# Altium PCB receiver_plane_2S_A.PcbDoc
Units mil, origin at the board's own origin, x right, y up, seen from the top; angles counter-clockwise.
Board outline 6000 x 4000 mil, 2 copper layers (Top Layer, Bottom Layer); 46 components, 38 nets, 159 pads, 9 vias.
Unrouted connection lines stored in the file: 113.
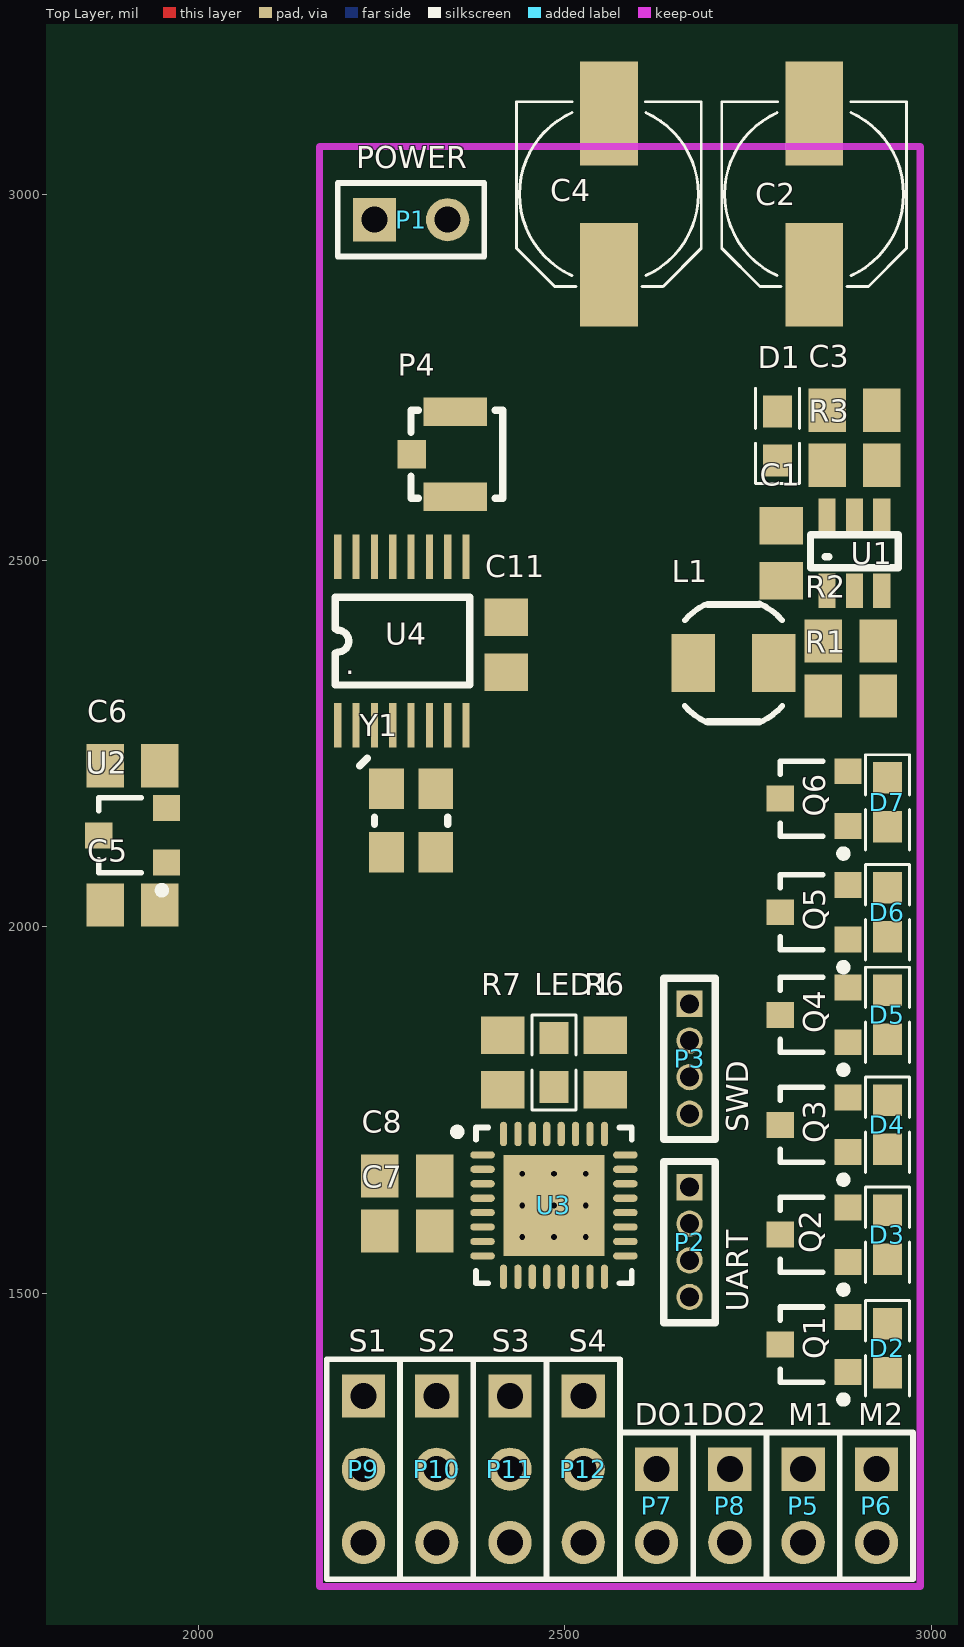
[diagram p0: Top Layer view]
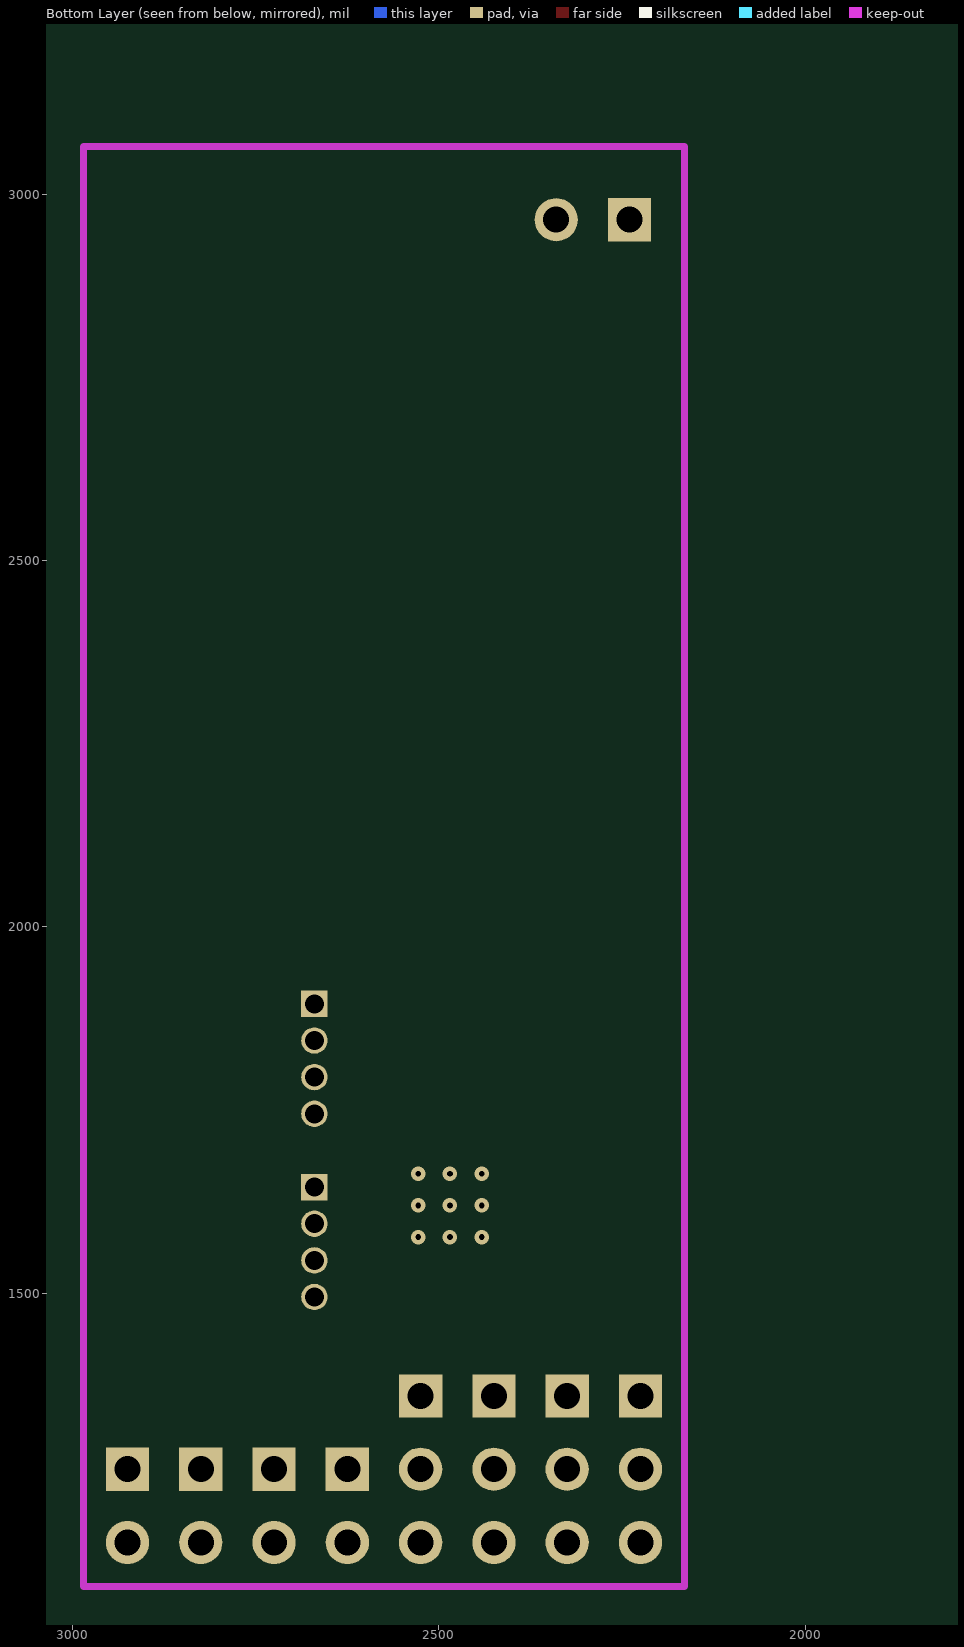
[diagram p1: Bottom Layer view, seen from below]

## Layer stack, top to bottom
Top Layer: signal copper 1.4
Dielectric: dielectric 12.6, FR-4, Dk 4.8
Bottom Layer: signal copper 1.4

## Board outline
1000,1000 7000,1000 7000,5000 1000,5000

## Design rules (kind name [scope] priority, off if disabled: settings)
Clearance [All] p1: gap=6
ComponentClearance [All] p1 off: gap=10 collisioncheckmode=3 verticalgap=10 showdistances=FALSE
PolygonConnect [All] p1: connectstyle=Relief reliefconductorwidth=10 reliefentries=4 polygonreliefangle="90 Angle"
RoutingVias [All] p1: holewidth=28 width=50 viastyle="Through Hole" minholewidth=28 minwidth=50 maxholewidth=28 maxwidth=50
SilkToSilkClearance [All] p1 off: silktosilkclearance=10
SilkscreenOverComponentPads [All] p1: minsilkscreentomaskgap=10
SolderMaskExpansion [All] p1: expansion=4
Width [All] p1: maxlimit=100 minlimit=10 preferedwidth=10 minimp=50.000000 maximp=50.000000 favimp=50.000000
25 further rules are at their usual default settings.

## Components (designator, comment, footprint, x,y, rotation, side; value= is the part's Value field where it differs from the comment)
C1 "103" 0805-2 2795,2510 r90 top
C2 "Cap Pol" C-RB-S6 2840,3000 r90 top
C3 "104" 0805-2 2895,2705 r180 top
C4 "Cap Pol" C-RB-S6 2560,3000 r90 top
C5 "Cap" 0805-2 1910,2030 r0 top
C6 "Cap" 0805-2 1910,2220 r180 top
C7 "Cap" 0805-2 2285,1585 r0 top
C8 "Cap" 0805-2 2285,1660 r180 top
C11 "Cap" 0805-2 2420,2385 r270 top
D1 "1N5819" SOD523 2790,2670 r270 top
D2 "1N5819" SOD523 2940,1425 r90 top
D3 "1N5819" SOD523 2940,1580 r90 top
D4 "1N5819" SOD523 2940,1730 r90 top
D5 "1N5819" SOD523 2940,1880 r90 top
D6 "1N5819" SOD523 2940,2020 r90 top
D7 "1N5819" SOD523 2940,2170 r90 top
L1 "Inductor" l-SMD-4 2730,2360 r0 top
LED1 "red" 0603-1 2485,1815 r270 top
P1 "POWER" HDR2X1_A 2240,2965 r0 top
P2 "UART" HDR4*1*1.27 2670,1595 r270 top
P3 "SWD" HDR4*1*1.27 2670,1845 r270 top
P4 "IPEX" U.FL-R-SMT 2350,2645 r270 top
P5 "M1" HDR2X1_A 2825,1260 r270 top
P6 "M2" HDR2X1_A 2925,1260 r270 top
P7 "DO1" HDR2X1_A 2625,1260 r270 top
P8 "DO2" HDR2X1_A 2725,1260 r270 top
P9 "S1" HDR3X1_A 2225,1360 r270 top
P10 "S2" HDR3X1_A 2325,1360 r270 top
P11 "S3" HDR3X1_A 2425,1360 r270 top
P12 "S4" HDR3X1_A 2525,1360 r270 top
Q1 "AO3400" SOT-23-3L 2840,1430 r90 top
Q2 "AO3400" SOT-23-3L 2840,1580 r90 top
Q3 "AO3400" SOT-23-3L 2840,1730 r90 top
Q4 "AO3400" SOT-23-3L 2840,1880 r90 top
Q5 "AO3400" SOT-23-3L 2840,2020 r90 top
Q6 "AO3400" SOT-23-3L 2840,2175 r90 top
R1 "Res1" 0805-2 2890,2315 r0 top
R2 "Res1" 0805-2 2890,2390 r180 top
R3 "Res1" 0805-2 2895,2630 r0 top
R6 "Res1" 0805-2 2555,1815 r90 top
R7 "Res1" 0805-2 2415,1815 r270 top
U1 "MP2359" TSOT23-6 2895,2510 r0 top
U2 "662K" SOT-23 1910,2125 r90 top
U3 "STM32F050K4U6" STM-UFQFPN32_N 2485,1620 r0 top
U4 "LT8920" "SSOP-16 LT8920" 2280,2390 r0 top
Y1 "12M" XTAL_3225 2290,2145 r270 top

## Footprints (in the part's own frame and the unit in brackets; to place one, negate y for a bottom-side part, rotate by r counter-clockwise, add the part's x,y. Pads: shape width x height; smd on the part's side, far side on the other; paste and mask are expansions set on the pad)
0603-1 [mm] "贴片"
  rect 1.1x1 smd: 1(-0.85,0) 2(0.85,0)
  silkscreen extent -1.65,-0.76 1.65,0.76, body extent -1.14,-0.38 1.14,0.38, height 1
0805-2 [mm] "贴片"
  rect 1.3x1.5 smd: 1(-0.95,0) 2(0.95,0)
  body extent -1.02,-0.51 1.02,0.51, height 1
C-RB-S6 [mm]
  rect 3.6x2 smd: 1(-2.794,0) 2(2.794,0)
  silkscreen extent -3.2,-3.2 3.2,3.2
HDR2X1_A [mm] "Connector; Header; 2 Posi"
  rect 1.5x1.5 hole 0.9: 1(0,0)
  round 1.5 hole 0.9: 2(2.54,0)
  silkscreen extent -1.27,-1.27 3.81,1.27
HDR3X1_A [mm] "Connector; Header; 3 Posi"
  rect 1.5x1.5 hole 0.9: 1(0,0)
  round 1.5 hole 0.9: 2(2.54,0) 3(5.08,0)
  silkscreen extent -1.27,-1.27 6.35,1.27
HDR4*1*1.27 [mil]
  rect 36x36 hole 26: 1(-50,0)
  round 36 hole 26: 2(0,0) 3(50,0) 4(100,0)
  silkscreen extent -85,-35 135,35
l-SMD-4 [mm] "CD43Ì"
  rect 1.5x2 smd: 1(-1.397,0) 2(1.397,0)
  silkscreen extent -1.69,-2.04 1.69,2.06
SOD523 [mm] "D1N5819_06"
  rect 1.1x1 smd: 1(-0.85,0) 2(0.85,0)
  silkscreen extent -1.65,-0.76 1.65,0.76, body extent -1.14,-0.38 1.14,0.38, height 1
SOT-23 [mm]
  rect 0.9x0.95 smd: 1(-0.95,-1.175) 2(0.95,-1.175) 3(0,1.175)
  silkscreen extent -2.03,-1.14 1.3,1.18
SOT-23-3L [mm] "AO3400"
  rect 0.9x0.95 smd: D(0,1.175) G(-0.95,-1.175) S(0.95,-1.175)
  silkscreen extent -2.03,-1.14 1.3,1.18
"SSOP-16 LT8920" [mil]
  rect 9.84x61.02 smd: 1(-90,-115) 2(-65,-115) 3(-40,-115) 4(-15,-115) 5(10,-115) 6(35,-115) 7(60,-115) 8(85,-115) 9(85,115) 10(60,115) 11(35,115) 12(10,115) 13(-15,115) 14(-40,115) 15(-65,115) 16(-90,115)
  silkscreen extent -93,-60 90,60
STM-UFQFPN32_N [mm] "QFN, 32-Leads, Body 5.1x5.1mm, Pitch 0.5mm, Thermal Pad 3.5x3.5mm, IPC Medium Density"
  oval 0.85x0.25 smd: 1(-2.475,1.75) 2(-2.475,1.25) 3(-2.475,0.75) 4(-2.475,0.25) 5(-2.475,-0.25) 6(-2.475,-0.75) 7(-2.475,-1.25) 8(-2.475,-1.75) 17(2.475,-1.75) 18(2.475,-1.25) 19(2.475,-0.75) 20(2.475,-0.25) 21(2.475,0.25) 22(2.475,0.75) 23(2.475,1.25) 24(2.475,1.75)
  oval 0.25x0.85 smd: 9(-1.75,-2.475) 10(-1.25,-2.475) 11(-0.75,-2.475) 12(-0.25,-2.475) 13(0.25,-2.475) 14(0.75,-2.475) 15(1.25,-2.475) 16(1.75,-2.475) 25(1.75,2.475) 26(1.25,2.475) 27(0.75,2.475) 28(0.25,2.475) 29(-0.25,2.475) 30(-0.75,2.475) 31(-1.25,2.475) 32(-1.75,2.475)
  rect 3.5x3.5 smd: 33(0,0)
  silkscreen extent -3.47,-2.7 2.7,2.7, body extent -2.55,-2.55 2.55,2.55, height 0.6
TSOT23-6 [mm] "MP2359"
  rect 0.6x1.2 smd: 1(-0.95,-1.3) 2(0,-1.3) 3(0.95,-1.3) 4(0.95,1.3) 5(0,1.3) 6(-0.95,1.3)
  silkscreen extent -1.52,-0.51 1.52,0.64
U.FL-R-SMT [mm] "IPEX插?"
  rect 1x1 smd: 1(0,-1.5)
  rect 1x2.2 smd: 2(-1.475,0) 3(1.475,0)
  silkscreen extent -1.52,-1.52 1.52,1.65
XTAL_3225 [mm] "Ì"
  rect 1.4x1.2 smd: 1(-1.1,-0.85) 2(1.1,-0.85) 3(1.1,0.85) 4(-1.1,0.85)
  silkscreen extent -2.16,-1.78 0.13,1.27

## Part data
C1 C3: library part "Cap Semi", "Capacitor (Semiconductor SIM Model)"
C2 C4: "极性电½"
C5 C6 C7 C8 C11: "无极性电容"
D1 D2 D3 D4 D5 D6 D7: library part Diode, "二极管"
L1: "电感"
LED1: library part LED3, "Typical BLUE SiC LED"
P1 P5 P6 P7 P8: library part "Header 2", "接插件"
P2 P3: library part "Header 4", "接插"
P4: "U.FL-R-SMT"
P9 P10 P11 P12: library part "Header 3", "接插件"
Q1 Q2 Q3 Q4 Q5 Q6: library part MOSFET-N, "N-Channel MOSFET"
R1 R2 R3 R6 R7: "贴片电阻"
U3: "ARM Cortex-M0 32-bit MCU, 16 KB Flash, 4 KB Internal RAM, 27 I/Os, 32-pin UFQFPN, -40 to 85 degC, Tray"
Y1: library part XTAL-4PIN, "贴片晶振"

## Via types
v1: diameter 19.68, hole 7.87, Top Layer to Bottom Layer, 9 vias

## Nets (pads, with @x,y where several pads share a name; then routed paths per layer and width w, separated by ;. In a path a pad name is that pad's centre, name@x,y a point inside that pad or via, vN(x,y) a via of type N, cw(c..) or ccw(c..) an arc to the next point about the centre after c; other vN are vias at no path point)
3V3: C6.1 C7.2 P3.4 R7.2 U2.2 U3.1 U3.5 U3.17 U4.12
5V: C4.1 C5.1 L1.2 P2.4 P9.1 P10.1 P11.1 P12.1 R1.1 U2.3
ANT: P4.1 U4.10
BAT+: C2.1 C3.2 D2.2 D3.2 D4.2 D5.2 D6.2 D7.2 P1.1 P5.1 P6.1 P7.1 P8.1 R3.1 U1.5
DO1_N: D6.1 P7.2 Q5.D
DO2_N: D7.1 P8.2 Q6.D
GND: C2.2 C3.1 C4.2 C5.2 C6.2 C7.1 C8.2 C11.1 D1.1 P1.2 P2.1 P3.3 P4.2 P4.3 P9.3 P10.3 P11.3 P12.3 Q1.S Q2.S Q3.S Q4.S Q5.S Q6.S R2.2 R6.2 U1.2 U2.1 U3.33 U4.9 U4.15 Y1.2 Y1.4
  other v1: 2441.69,1576.69 2485,1576.69 2528.31,1576.69 2441.69,1620 2485,1620 2528.31,1620 2441.69,1663.31 2485,1663.31 2528.31,1663.31
LED1: LED1.2 U3.32
LT8920_CS: U3.29 U4.14
LT8920_PKT: U3.30 U4.13
LT8920_RST: U3.25 U4.4
MOTO1_N: D2.1 D3.1 P5.2 Q1.D Q2.D
MOTO2_N: D4.1 D5.1 P6.2 Q3.D Q4.D
NetC1_1: C1.1 U1.1
NetC1_2: C1.2 D1.2 L1.1 U1.6
NetC8_1: C8.1 U3.4
NetC11_2: C11.2 U4.3 U4.5 U4.8 U4.11
NetLED1_1: LED1.1 R7.1
NetR1_2: R1.2 R2.1 U1.3
NetR3_2: R3.2 U1.4
NetR6_1: R6.1 U3.31
NetU4_6: U4.6 Y1.1
NetU4_7: U4.7 Y1.3
PWM_DO1: Q5.G U3.8
PWM_DO2: Q6.G U3.9
PWM_M1: Q1.G Q2.G U3.6
PWM_M2: Q3.G Q4.G U3.7
SERVO1: P9.2 U3.12
SERVO2: P10.2 U3.13
SERVO3: P11.2 U3.14
SERVO4: P12.2 U3.15
SPI_CLK: U3.26 U4.16
SPI_MISO: U3.27 U4.2
SPI_MOSI: U3.28 U4.1
SWCLK: P3.1 U3.24
SWDIO: P3.2 U3.23
UART_RX: P2.2 U3.20
UART_TX: P2.3 U3.19
pads on no net: U3.2 U3.3 U3.10 U3.11 U3.16 U3.18 U3.21 U3.22

## Keep-outs
Keep-Out Layer:
  lines w10: 2165,1100 2985,1100 2985,3065 2165,3065 2165,1100